# Altium PCB wisp-6-dipole.PcbDoc
Units mil, origin at the board's own origin, x right, y up, seen from the top; angles counter-clockwise.
Board outline 1302.99 x 5829.89 mil, 4 copper layers (Top Layer, Mid-Layer 1, Mid-Layer 2, Bottom Layer); 77 components, 65 nets, 270 pads, 87 vias.
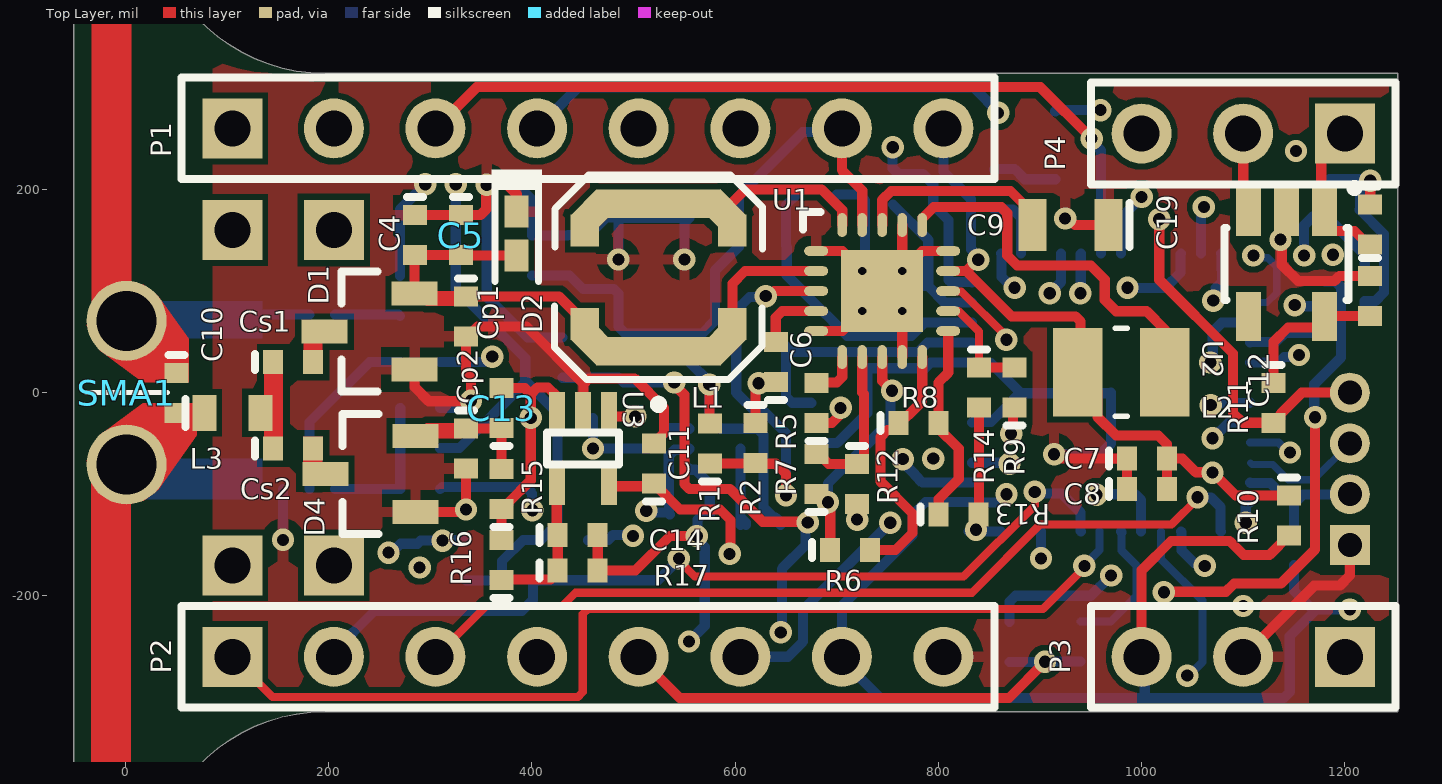
[diagram p0: Top Layer view]
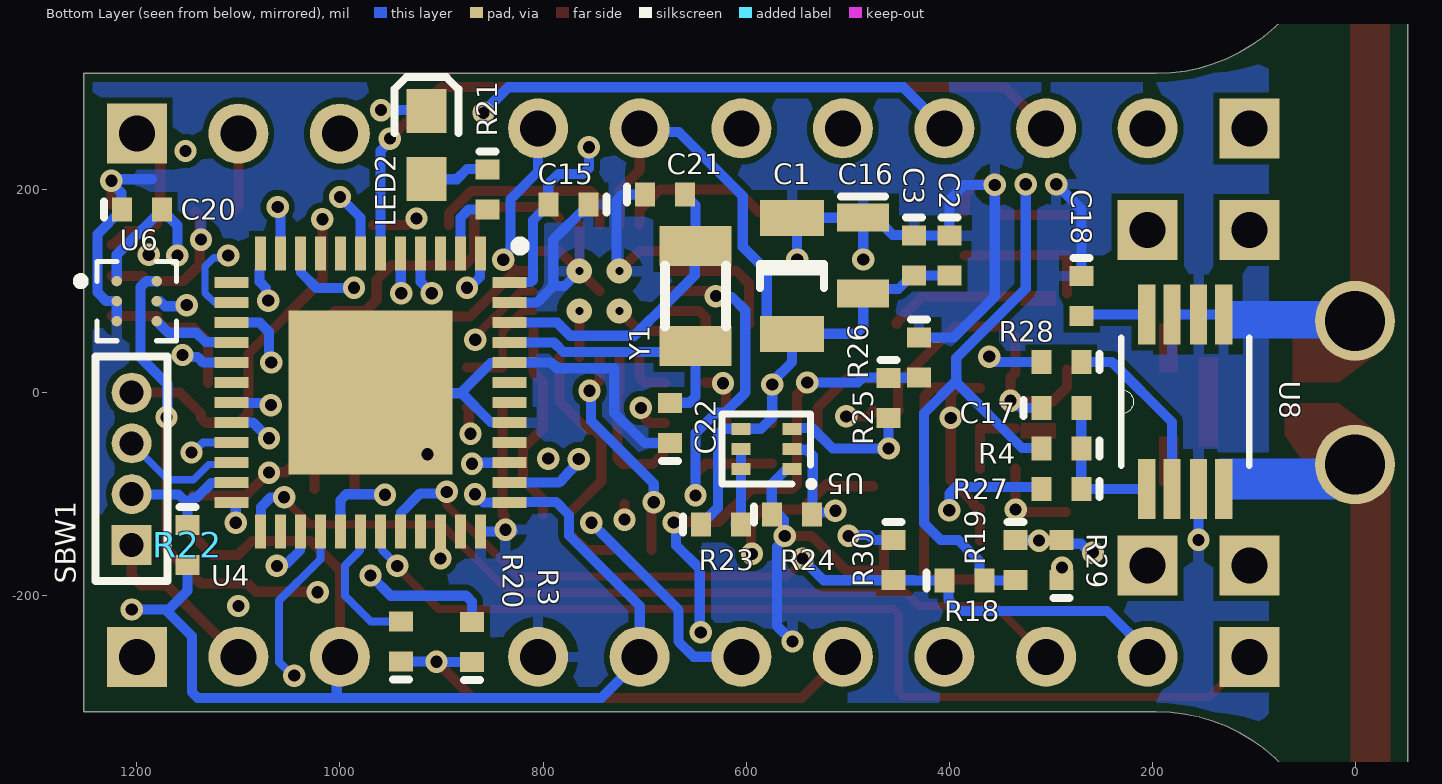
[diagram p1: Bottom Layer view, seen from below]
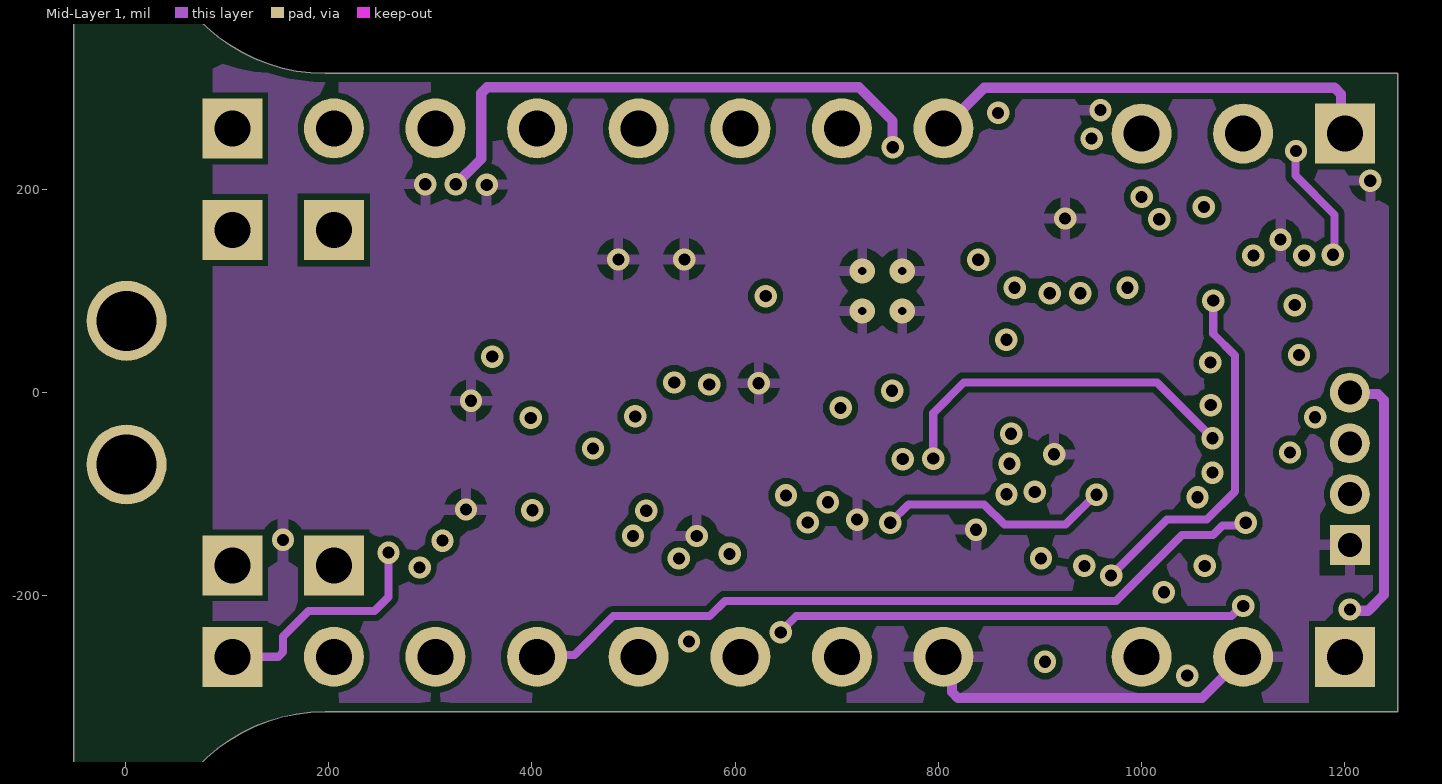
[diagram p2: Mid-Layer 1]
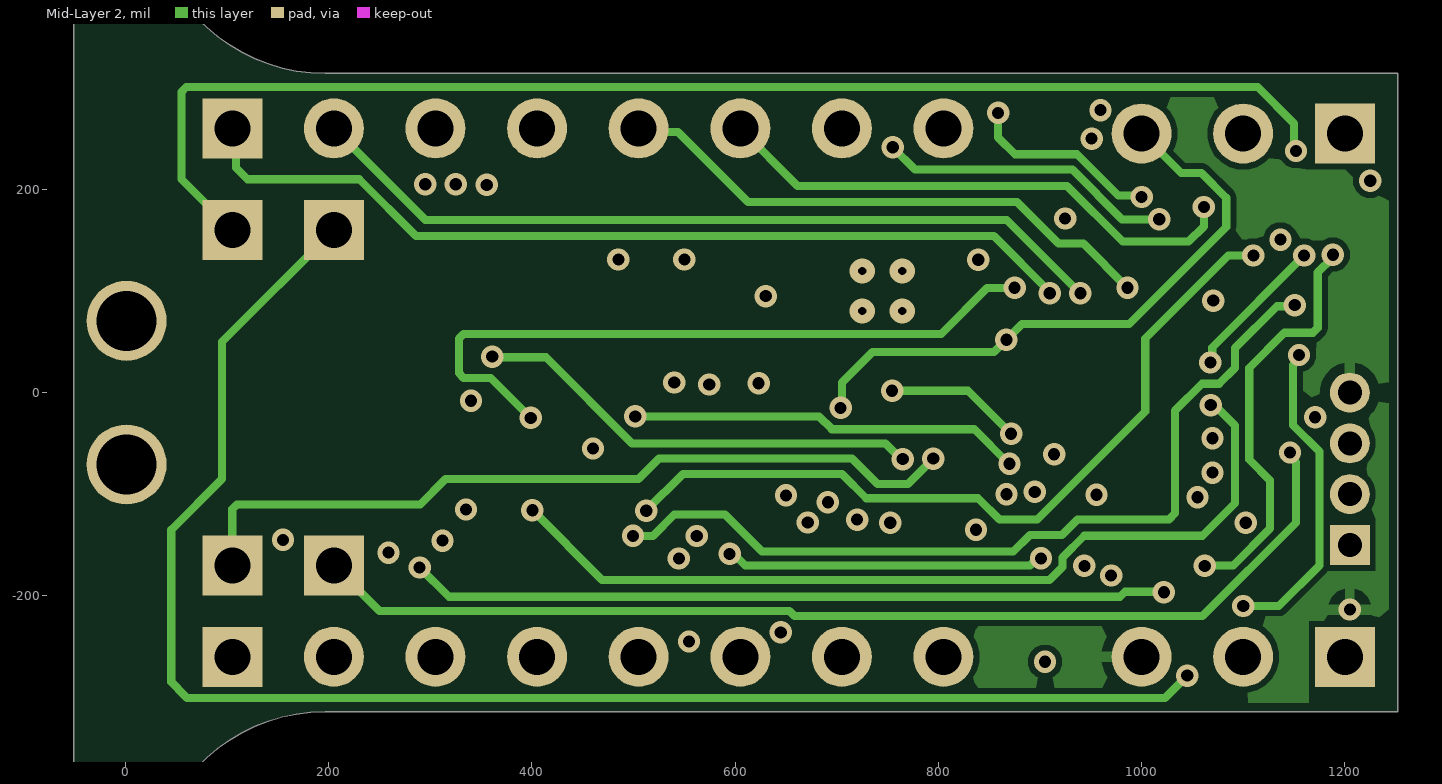
[diagram p3: Mid-Layer 2]

## Layer stack, top to bottom
Top Solder: solder mask 0.4, Solder Resist, Dk 3.5
Top Layer: signal copper 1.4
Dielectric 1: dielectric 12.6, FR-4, Dk 4.8
Mid-Layer 1: signal copper 1.4
Dielectric3: dielectric 12.6, FR-4, Dk 4.8
Mid-Layer 2: signal copper 1.4
Dielectric2: dielectric 12.6, FR-4, Dk 4.8
Bottom Layer: signal copper 1.4
Bottom Solder: solder mask 0.4, Solder Resist, Dk 3.5

## Board outline
-50.99,-2875.73 -50.99,2874.27 cw(c-13.49,2876.77) 24.01,2874.27 24.01,2874.28 24.01,486.61 ccw(c196.48,486.61) 196.48,314.15 1252,314.15 1252,-314.15 196.48,-314.15 196.48,-314.01 ccw(c196.48,-486.47) 24.01,-486.47 24.01,-2875.73 cw(c-13.49,-2878.23)

## Design rules (kind name [scope] priority, off if disabled: settings)
BoardOutlineClearance BoardOutlineClearance_1 [(OnLayer('Bottom Overlay') AND OnLayer('Top Overlay'))] p1: gap=8.5 ignorepadtopadclearanceinfootprint=FALSE except(5: Track-OutlineEdge Track-CavityEdge Track-CutoutEdge Track-SplitBarrior Track-SplitContinuation Text-OutlineEdge Text-CavityEdge Text-CutoutEdge Text-SplitBarrior Text-SplitContinuation)
BoardOutlineClearance [Not OnLayer('Bottom Overlay') AND  Not OnLayer('Top Overlay')] p2: gap=8.5 ignorepadtopadclearanceinfootprint=FALSE except(5: Text-OutlineEdge Text-CavityEdge Text-CutoutEdge Text-SplitBarrior Text-SplitContinuation)
Clearance [All] p1: gap=5.98 ignorepadtopadclearanceinfootprint=FALSE except(0: Arc-Hole Track-Hole SMDPad-Hole THPad-Hole Via-Hole Fill-Hole Poly-Hole Region-Hole Text-Hole; 6: SMDPad-SMDPad)
HoleSize [All] p1: absolutevalues=TRUE maxlimit=248.03 minlimit=7.87 maxpercent=80.000 minpercent=20.000
MinimumSolderMaskSliver [All] p1: minsoldermaskwidth=0.59
PolygonConnect [All] p1: connectstyle=Relief reliefconductorwidth=10 reliefentries=4 polygonreliefangle="90 Angle" airgapwidth=10
RoutingVias [All] p1: holewidth=8 width=20 viastyle="Through Hole" minholewidth=8 minwidth=20 maxholewidth=28 maxwidth=50
SilkToSilkClearance [All] p1: silktosilkclearance=0
SilkToSolderMaskClearance [IsPad] p1: minsilkscreentomaskgap=0 clearancetoexposedcopper=TRUE
SolderMaskExpansion [All] p1: expansion=4 istentingtop=FALSE
Width [All] p1: maxlimit=20 minlimit=7 preferedwidth=10
26 further rules are at their usual default settings.

## Classes and differential pairs
component class wisp-6-main: P1 P2 P3 P4 R3 R20
component class U_wisp-6-peripherals: C20 R23 R24 R25 R26 R29 R30 U5 U6
component class U_wisp-6-mcu: C15 C21 C22 LED2 R18 R19 R21 R22 SBW1 U4 Y1
component class U_wisp-6-afe: C1 C2 C3 C4 C5 C6 C7 C8 C9 C10 C11 C12 C13 C14 C16 C17 C18 C19 Cp1 Cp2 Cs1 Cs2 D1 D2 D4 L1 L2 L3 R1 R2 R4 R5 R6 R7 R8 R9 R10 R11 R12 R13 R14 R15 R16 R17 R27 R28 SMA1 U1 U2 U3 U8

## Components (designator, comment, footprint, x,y, rotation, side; value= is the part's Value field where it differs from the comment)
C1 "Cap" 1206 555,115 r270 bottom value=220uF
C2 "Cap" 0402 400,135 r270 bottom value=4.7uF
C3 "Cap" 0402 435,135 r270 bottom value=0.1uF
C4 "Cap" 0402 285,155 r270 top value=0.1uF
C5 "Cap" 0402 330,155 r270 top value=4.7uF
C6 "Cap" 0402 640,30 r90 top value=0.01uF
C7 "Cout1" 0402 1005.31,-65 r0 top value=22uF
C8 "Cout2" 0402 1005.31,-95 r0 top value=DNP
C9 "Cap" 0805 930,165 r180 top value=100uF
C10 "Cap" 0402 50,-0.31 r270 top value=5.6pF
C11 "Cap" 0402 520,-69.69 r90 top value=0.1uF
C12 "Cap" 0402 1225,95 r270 top value=1uF
C13 "Cap" 0402 370,-15.32 r90 top value=33pF
C14 "Cap" 0402 445,-140 r0 top value=1nF
C15 "Cap" 0402 775,185 r0 bottom value=4.7uF
C16 "Cap" 0805 485,135 r270 bottom value=100uF
C17 "Cap" 0402 290,-15 r180 bottom value=0.1uF
C18 "Cap" 0402 270,95 r270 bottom value=3.3nF
C19 "Cap" 0402 1225,165.31 r270 top value=1uF
C20 "Cap" 0402 1195,180 r180 bottom value=0.1uF
C21 "Cap" 0402 680,195 r180 bottom value=10pF
C22 "Cap" 0402 675,-30 r90 bottom value=10pF
Cp1 "Cap" 0402 335,75 r270 top value=33pF
Cp2 "Cap" 0402 335,-55 r270 top value=10pF
Cs1 "Cap" 0402 165,30 r0 top value=33pF
Cs2 "Cap" 0402 165,-55 r0 top value=1pF
D1 "SMS7630-005LF" "SOT23 - N" 240,60 r180 top
D2 "Zener_SOD-523" Zener_SOD-523 385,156.65 r180 top
D4 "SMS7630-005LF" "SOT23 - N" 240.95,-80 r180 top
L1 "Ind_LPS4018" LPS4018 520,105 r180 top value=22uH
L2 "Ind" IND1008 980,20 r180 top value=10nH
L3 "Ind" 0603 105,-20 r0 top value=16nH
LED2 "LED" "Diode - 0603" 915,243.46 r270 bottom
P1 "Header 8" HDR1X8 105,260 r0 top
P2 "Header 8" HDR1X8 105,-260 r0 top
P3 "Header 3" HDR1X3 1200,-260 r180 top
P4 "Header 3" HDR1X3 1200,255 r180 top
R1 "R_80%" 0402 575,-50 r90 top value=DNP
R2 "R_50%" 0402 620,-49.68 r270 top value=0
R3 "Res" 0402 870,-245.32 r90 bottom value=0
R4 "Rok3" 0402 290,-55 r0 bottom value=DNP
R5 "R_VBAT_OK" 0402 680,-10.32 r90 top value=0
R6 "Rok3" 0402 713.21,-155 r0 top value=2.94M
R7 "Rov2" 0402 680,-80 r90 top value=6.8M
R8 "Rok2" 0402 780.31,-30 r0 top value=5.49M
R9 "Rout2" 0402 875,5 r90 top value=6.81M
R10 "Res" 0402 1145,-121.03 r270 top value=DNP
R11 "Res" 0402 1130,-10 r270 top value=0
R12 "Rov1" 0402 720,-90 r270 top value=5.49M
R13 "Rok1" 0402 820,-120 r0 top value=4.53M
R14 "Rout1" 0402 840,5 r270 top value=6.04M
R15 "Res" 0402 370,-94.69 r90 top value=560k
R16 "Res" 0402 370,-165 r90 top value=22k
R17 "Res" 0402 445,-175 r0 top value=220k
R18 "Res" 0402 385.32,-185 r180 bottom value=47k
R19 "Res" 0402 335,-165 r270 bottom value=47k
R20 "Res" 0402 940,-245 r90 bottom value=DNP
R21 "Res" 0402 855,200 r270 bottom value=33
R22 "Res" 0402 1150,-150 r270 bottom value=47k
R23 "Res" 0402 625,-130 r180 bottom value=1M
R24 "Res" 0402 555.32,-120 r180 bottom value=1M
R25 "Res" 0402 460,-5.31 r270 bottom value=1M
R26 "Res" 0402 430,34.69 r270 bottom value=1M
R27 "Rok3" 0402 289.69,-95 r0 bottom value=0
R28 "Rok3" 0402 290,30 r0 bottom value=0
R29 "Res" 0402 290,-165 r90 bottom value=0
R30 "Res" 0402 455,-165 r270 bottom value=0
SBW1 "MHDR1X4" MHDR1X4 1205,-150 r90 bottom
SMA1 "SMA - Hole - 2 Pin" "SMA - Hole - 2 Pin" 1,0 r180 top
U1 "BQ25570" BQ25570 744.68,99.96 r0 top
U2 "TPS7A0220PDBVR" SOT23-5 1142.6,126.57 r180 top
U3 "TLV7041" SC70-5 450,-55 r180 top
U4 "MSP430 Wolverine 48-Pin" MSP_QFN48_RGZ_PAD0 970,0 r270 bottom
U5 "SI1016X" "SC-89-6 Vishay" 580.12,-55.32 r0 bottom
U6 "HDC2010YPAR" BGA6C100X50P2X3_HDC2010YPAR 1200,90 r180 bottom
U8 "ADG902BRMZ" SOP65P490X110-8N 168,-9 r90 bottom
Y1 "XTAL" "XTAL [3.20mm x 1.50mm]" 650,95 r90 bottom value=32.768kHz

## Footprints (in the part's own frame and the unit in brackets; to place one, negate y for a bottom-side part, rotate by r counter-clockwise, add the part's x,y. Pads: shape width x height; smd on the part's side, far side on the other; paste and mask are expansions set on the pad)
0402 [mm] "Surface Mount; Body 1 x 0.5 mm (LxW typ)"
  rect 0.5x0.6 smd: 1(-0.5,0) 2(0.5,0)
  silkscreen extent -0.95,-0.2 -0.95,0.2, body extent -0.5,-0.25 0.5,0.25, height 0.5
0603 [mm] "Surface Mount; Body 1.6 x 0.8 mm (LxW typ)"
  rect 0.6x0.9 smd: 1(-0.7,0) 2(0.7,0)
  silkscreen extent -1.17,-0.35 -1.17,0.35, body extent -0.8,-0.4 0.8,0.4, height 0.8
0805 [mm] "Surface Mount; Body 2.0 x 1.25 mm (LxW typ)"
  rect 0.7x1.3 smd: 1(-0.95,0) 2(0.95,0)
  silkscreen extent -1.48,-0.55 -1.48,0.55, body extent -1,-0.63 1,0.63, height 1.25
1206 [mm] "Surface Mount; Body 3.2 x 1.6 mm (LxW typ)"
  rect 0.9x1.6 smd: 1(-1.45,0) 2(1.45,0)
  silkscreen extent -0.3,-0.8 0.3,0.8, body extent -1.6,-0.8 1.6,0.8, height 1.1
BGA6C100X50P2X3_HDC2010YPAR [mm]
  round 0.26 smd: A1(-0.5,0.5) A2(0.5,0.5) B1(-0.5,0) B2(0.5,0) C1(-0.5,-0.5) C2(0.5,-0.5)
  silkscreen extent -1.5,-0.99 0.99,0.99
BQ25570 [mm] "Boost Charger"
  oval 0.6x0.24 smd paste-0.025 mask+0.07: 1(-1.65,1) 2(-1.65,0.5) 3(-1.65,0) 4(-1.65,-0.5) 5(-1.65,-1) 11(1.65,-1) 12(1.65,-0.5) 13(1.65,0) 14(1.65,0.5) 15(1.65,1)
  oval 0.24x0.6 smd paste-0.025 mask+0.07: 6(-1,-1.65) 7(-0.5,-1.65) 8(0,-1.65) 9(0.5,-1.65) 10(1,-1.65) 16(1,1.65) 17(0.5,1.65) 18(0,1.65) 19(-0.5,1.65) 20(-1,1.65)
  rect 2.05x2.05 smd paste-1.025 mask+0.07: 21(0,0)
  silkscreen extent -1.97,1.54 -1.54,1.98, body extent -1.82,-1.82 1.83,1.83, height 1.01
"Diode - 0603" [mm] "Diode: Body 1.6 x 0.8 mm (LxW typ)"
  rect 1.1x1 smd: 1(0.85,0) 2(-0.85,0)
  silkscreen extent -1.7,-0.8 -0.3,0.8
HDR1X3 [mm] "Connector; Header; 3 Position"
  rect 1.5x1.5 hole 0.9: 1(0,0)
  round 1.5 hole 0.9: 2(2.54,0) 3(5.08,0)
  silkscreen extent -1.27,-1.27 6.35,1.27
HDR1X8 [mm] "Connector; Header; 8 Position"
  rect 1.5x1.5 hole 0.9: 1(0,0)
  round 1.5 hole 0.9: 2(2.54,0) 3(5.08,0) 4(7.62,0) 5(10.16,0) 6(12.7,0) 7(15.24,0) 8(17.78,0)
  silkscreen extent -1.27,-1.27 19.05,1.27
IND1008 [mm]
  rect 1.24x2.22 smd: 1(-1.09,0) 2(1.09,0)
  silkscreen extent -0.15,-1.1 0.15,1.1
LPS4018 [mil] "Inductor"
  rect 28x31.5 smd: 1(-77.03,37.61) 1(67.97,37.61) 2(-77.03,-54.39) 2(67.97,-54.39)
  rect 35.5x28 smd rot 45: 1(-68.53,55.61) 2(59.47,-72.39)
  rect 123x28 smd: 1(-4.53,64.11) 2(-4.53,-80.89)
  rect 35.5x28 smd rot 135: 1(59.47,55.61) 2(-68.03,-72.89)
  silkscreen extent -107,-109 98,120, body extent -85,-89 76,72, height 71
MHDR1X4 [mm] "Connector; Header; 4 Position"
  rect 1x1 hole 0.6: 1(0,0)
  round 1 hole 0.6: 2(1.27,0) 3(2.54,0) 4(3.81,0)
  silkscreen extent -0.9,-0.9 4.71,0.9
MSP_QFN48_RGZ_PAD0 [mm]
  rect 4.1x4.1 smd: 0(0,0)
  rect 0.85x0.28 smd: 1(-3.475,2.75) 2(-3.475,2.25) 3(-3.475,1.75) 4(-3.475,1.25) 5(-3.475,0.75) 6(-3.475,0.25) 7(-3.475,-0.25) 8(-3.475,-0.75) 9(-3.475,-1.25) 10(-3.475,-1.75) 11(-3.475,-2.25) 12(-3.475,-2.75) 25(3.475,-2.75) 26(3.475,-2.25) 27(3.475,-1.75) 28(3.475,-1.25) 29(3.475,-0.75) 30(3.475,-0.25) 31(3.475,0.25) 32(3.475,0.75) 33(3.475,1.25) 34(3.475,1.75) 35(3.475,2.25) 36(3.475,2.75)
  rect 0.28x0.85 smd: 13(-2.75,-3.475) 14(-2.25,-3.475) 15(-1.75,-3.475) 16(-1.25,-3.475) 17(-0.75,-3.475) 18(-0.25,-3.475) 19(0.25,-3.475) 20(0.75,-3.475) 21(1.25,-3.475) 22(1.75,-3.475) 23(2.25,-3.475) 24(2.75,-3.475) 37(2.75,3.475) 38(2.25,3.475) 39(1.75,3.475) 40(1.25,3.475) 41(0.75,3.475) 42(0.25,3.475) 43(-0.25,3.475) 44(-0.75,3.475) 45(-1.25,3.475) 46(-1.75,3.475) 47(-2.25,3.475) 48(-2.75,3.475)
  silkscreen extent -3.78,3.63 -3.55,3.85, body extent -3.3,-3.3 3.3,3.3, height 1
SC70-5 [mm] "SC70-5"
  rect 0.4x0.92 smd: 1(-0.65,-0.95) 2(0,-0.95) 3(0.65,-0.95) 4(0.65,0.95) 5(-0.65,0.95)
  silkscreen extent -0.9,-0.4 0.9,0.4
"SC-89-6 Vishay" [mm]
  rect 0.478x0.3 smd: 1(-0.638,0.5) 2(-0.638,0) 3(-0.638,-0.5) 4(0.638,-0.5) 5(0.638,0) 6(0.638,0.5)
  silkscreen extent -1.15,-0.87 1.11,0.91
"SMA - Hole - 2 Pin" [mm] "SMA port for wisp"
  round 2 hole 1.5: 1(0,1.796) 2(0,-1.796)
  silkscreen extent -1.02,0 1.02,0
SOP65P490X110-8N [mil]
  rect 59x17 smd: 1(-86,38) 2(-86,13) 3(-86,-13) 4(-86,-38) 5(86,-38) 6(86,-13) 7(86,13) 8(86,38)
  silkscreen extent -63,-63 63,63, body extent -96,-59 96,59, height 43
"SOT23 - N" [mm] "SOT23, 3-Leads, Body 2.9x1.3mm, Pitch 0.95mm, Lead Span 2.3mm - Reverse Pinning, IPC Medium Density"
  rect 1.15x0.6 smd: 1(-1.125,0.95) 2(-1.125,-0.95) 3(1.125,0)
  silkscreen extent -0.2,-1.5 0.7,1.5, body extent -0.7,-1.5 0.7,1.5, height 1.1
SOT23-5 [mm] "SOT23-5"
  rect 0.62x1.22 smd: 1(-0.95,-1.31) 2(0,-1.31) 3(0.95,-1.31) 4(0.95,1.31) 5(-0.95,1.31)
  silkscreen extent -1.8,-2 1.55,0.9, body extent -1.55,-0.9 1.55,0.9, height 1
"XTAL [3.20mm x 1.50mm]" [mm] "FC-135   crystal - epson eletronics"
  rect 1x1.8 smd: 1(-1.25,0) 2(1.25,0)
  silkscreen extent -0.76,-0.76 0.76,0.76
Zener_SOD-523 [mm] "Zener Diod"
  rect 0.6x0.8 smd paste-0.05: 1(0,-0.55) 2(0,0.55)
  silkscreen extent -0.63,-1.6 0.64,1.2, body extent -0.4,-0.8 0.4,0.8, height 0.72

## Part data
C1 C2 C3 C4 C5 C6 C9 C10 C11 C12 C13 C14 C15 C16 C17 C18 C19 C20 C21 C22 Cp1 Cp2 Cs1 Cs2: "Ceramic Capacitor (Surface Mount)", Manufacturer="Generic Ceramic Chip Cap (TBD)"
C7 C8: library part Cap, "Ceramic Capacitor (Surface Mount)", Manufacturer="Generic Ceramic Chip Cap (TBD)", Comment_1=Cap
D1 D4: "Schottky Diodes & Rectifiers Ls=1.5nH SOT-23 Series Pair"
D2: "Diode - Zener"
L1: "Inductor (Surface Mount)", Manufacturer="Coil Craft"
L2 L3: "Inductor (Surface Mount)"
LED2: library part "Diode - LED", "Typical RED, GREEN, YELLOW, AMBER GaAs LED"
P1 P2: "Header, 8-Pin", LatestRevisionDate=17-Jul-2002, LatestRevisionNote="Re-released for DXP Platform.", Publisher="Altium Limited"
P3 P4: "Header, 3-Pin", LatestRevisionDate=17-Jul-2002, LatestRevisionNote="Re-released for DXP Platform.", Publisher="Altium Limited"
R1 R2 R4 R5 R6 R7 R8 R9 R12 R13 R14 R27 R28: library part Res, "Chip Resistor (Surface Mount)", Manufacturer="Generic Chip Res (TBD)", Comment_1=Res
R3 R10 R11 R15 R16 R17 R18 R19 R20 R21 R22 R23 R24 R25 R26 R29 R30: "Chip Resistor (Surface Mount)", Manufacturer="Generic Chip Res (TBD)"
SBW1: "Header, 4-Pin", LatestRevisionDate=17-Jul-2002, LatestRevisionNote="Re-released for DXP Platform.", Publisher="Altium Limited"
SMA1: "Two pin SMA connector wisp", Note="This part is used to attach the antennae to WISP in the layout"
U1: "Boost Charger", Digi-Key Part Number=296-37014-1-ND, Manufacturer="Texas Instruments", Manufacturer Part Number=bq25570
U2: library part TPS7A0218PDBVR, "IC REG LINEAR 1.8V 200MA SOT23-5"
U3: library part NCS2200, "Comparator General Purpose Open Drain SC-70-5", Digi-Key Part Number=NCS2200SQ2T2GOSTR-ND, Manufacturer="ON Semiconductor", Manufacturer Part Number=NCS2200SQ2T2G
U4: library part MSP430FR596X_586X_RGZ, "16-bit FRAM MCU", Manufacture="Texas Instrument", PartNumber=MSP430FR5969, Datasheet Link=http://www.ti.com/lit/gpn/msp430fr5969
U5: "NMOS and PMOS array"
U6: "Humidity Temperature Sensor 0 ~ 100% RH IÂ²C Â±2% 8s Surface Mount", Package="DSBGA-6 Texas Instruments", Digi-Key_Part_Number=296-47774-1-ND, Digi-Key_Purchase_URL=https://www.digikey.in/product-detail/en/texas-instruments/HDC2010YPAR/296-47774-1-ND/8133123?utm_source=snapeda&utm_medium=aggregator&utm_campaign=symbol, MF="Texas Instruments", MP=HDC2010YPAR, SnapEDA_Link=https://www.snapeda.com/parts/HDC2010YPAR/Texas%20Instruments/view-part/1603012/?ref=snap
U8: "RF Switch IC General Purpose SPST 2.5GHz 50Ohm 8-MSOP", Package="MSOP-8 Analog Devices", Check_prices=https://www.snapeda.com/parts/ADG902BRMZ/Analog%20Devices%20Inc./view-part/233734/?ref=eda, Digi-Key_Part_Number=ADG902BRMZ-ND, MF="Analog Devices", MP=ADG902BRMZ, Purchase-URL=https://pricing.snapeda.com/search/part/ADG902BRMZ/?ref=eda, SnapEDA_Link=https://www.snapeda.com/parts/ADG902BRMZ/Analog%20Devices%20Inc./view-part/233734/?ref=snap
Y1: library part "XTAL 2-pins", "Crystal Oscillator - [3.20mm x 1.50mm]", Digi-Key Part Number="example: SE2413CT-ND", Manufacturer="Epson Toyocom Corporation", Manufacturer Part Number="FC-135 32.7680KA-A3"

## Free pads (board coordinates)
  rect 59.06x59.06 hole 35.43: 1(105,-170) 1(105,160) 1(205,-170) 1(205,160)

## Via types
v1: diameter 22, hole 12, Top Layer to Bottom Layer, tented both sides, 83 vias
v2: diameter 25, hole 8, Top Layer to Bottom Layer, 4 vias

## Nets (pads, with @x,y where several pads share a name; then routed paths per layer and width w, separated by ;. In a path a pad name is that pad's centre, name@x,y a point inside that pad or via, vN(x,y) a via of type N, cw(c..) or ccw(c..) an arc to the next point about the centre after c; other vN are vias at no path point)
1V8: C12.2 R11.1 U2.5 | length 147.9
  Top Layer w10: R11.1 1130,50 1144.14,64.14 1172.8,64.14 1180,71.35 U2.5 1180.31,75.31 C12.2
3V3: C7.2 C8.2 C19.2 L2.2 P1.8 P4.1 R10.1 U1.14 U2.1 | length 1298.1
  Top Layer w10: P1.8 P1.8@806.34,260 ; U1.14 827.38,119.65 ; v1(839.24,130.76) 838.5,130.76 827.38,119.65 ; C8.2 C7.2 ; v1(1069.84,-78.78) 1069.48,-78.43 1053.43,-78.43 1040,-65 C7.2 ; v1@1070,-78.67 1092.68,-101.35 R10.1 ; P4.1 1176.85,231.85 1176.85,181.3 U2.1 1180,166.34 1187.2,159.13 1209.53,159.13 1223.03,145.63 C19.2 ; 827.38,119.65 872.02,75 935,75 940,70 940,17.09 L2.2 956.5,0.59 956.5,-23.7 975,-42.2 1016.35,-42.2 1025,-50.86 C7.2
  Mid-Layer 1 w10: P1.8 845,300 1190,300 1196.33,293.67 1196.33,258.67 P4.1 P4.1@1204.91,250.09
  Mid-Layer 2 w8: P1.8 P1.8@812.57,260
  Bottom Layer w10: P1.8 805,217.61 832.2,190.4 832.2,141.04 839.24,134.01 v1(839.24,130.76)
ANT: C10.2 L3.1 SMA1.1 U8.4
BITLINE: C13.2 R15.1 R16.2 U3.3 U4.1 | length 965.2
  Top Layer w10: R16.2 R15.1@370,-115 ; R15.1 R15.1@370,-115 ; C13.2 392.94,4.37 398.79,-1.49 ; U3.3 424.41,-3.73 415.68,5 405.28,5 398.79,-1.49 ; R15.1@370,-115 371.34,-115 376.81,-109.53 376.81,-108.19 398.79,-86.21 v1(398.79,-24.88) 398.79,-1.49
  Mid-Layer 2 w8: v1(398.79,-24.88) 359.45,14.46 332.71,14.46 328.02,19.14 328.02,53.11 332.71,57.79 802.79,57.79 847.91,102.91 874.79,102.91 v1(875,103.12)
  Bottom Layer w10: U4.1 862.24,136.3 862.24,113.82 872.95,103.12 v1(875,103.12)
BITLINE_LPF: C14.1 R16.1 R17.1 U3.4 | length 143.5
  Top Layer w10: R16.1 370.64,-184.05 418.24,-184.05 425.32,-176.97 C14.1 424.41,-139.09 U3.4
GND: C1.1 C2.1 C3.1 C4.1 C5.1 C6.1 C7.1 C8.1 C9.1 C10.1 C11.2 C12.1 C14.2 C15.1 C16.1 C17.1 C18.1 C19.1 C20.1 C21.1 C22.1 Cp1.2 Cp2.2 D1.1 D2.1 D4.1 LED2.2 P2.8 P3.2 R2.1 R12.2 R13.2 R14.2 R17.2 R24.1 R26.1 SBW1.1 SMA1.2 U1.1 U1.5 U1.9 U1.15 U1.17 U1.21 U2.2 U3.2 U4.0 U4.36 U4.41 U4.44 U4.47 U5.1 U6.B1 U6.C1 U8.3 U8.5 U8.6 U8.7 | length 4212.1
  Top Layer w10: D1.1 284.29,5.71 298.49,-8.49 340,-8.49 v1(340,-8.02) 340,15 335,20 Cp1.2 336.97,55.31 346.65,65 394.6,65 450.79,8.81 ; C4.1 C5.1 349.14,174.69 355,180.54 355,203.91 v1(355.55,204.45) 356.09,205 375,205 385,195 D2.1 ; D4.1 329.35,-117.4 331.75,-115 v1(335,-115) Cp2.2 ; U3.2 450.79,-16.81 450.79,8.81 ; C14.2 R17.2 501.86,-175 535.77,-141.09 v1(562.18,-141.09) ; C11.2 530,-40 530,-15 500.99,14.01 455.99,14.01 450.79,8.81 ; R2.1 620,2.81 623.06,5.87 v1(623.06,9.12) 623.66,9.72 639.4,9.72 C6.1 ; U1.5 705.32,60.59 v2(725,80.28) ; U1.1 705.32,139.33 v2(725,119.65) ; v1(720,-125) R12.2 ; U1.21 v2(764.37,119.65) ; U1.9 v2(764.37,80.28) ; U1.17 v2(764.37,119.65) ; U1.15 784.06,139.33 v2(764.37,119.65) ; v1(837.03,-135) 838.36,-133.67 838.36,-121.33 R13.2 ; R13.2@840,-120 R14.2 ; v1(913.94,-60.72) 917.19,-60.72 921.47,-65 C7.1 C8.1 ; v1(924.74,171.35) 927.99,171.35 934.34,165 C9.1 ; P3.2 1170,-190 1195,-190 1205,-180 SBW1.1 ; v1(1136.75,150.58) 1138.02,149.31 1138.02,125.89 1153.91,110 1190,110 1194.68,114.68 C12.1 ; v1@1138.02,150.58 1138.02,173.57 U2.2 ; C19.1 v1(1225,208.49)
  Top Layer w20: SMA1.2@-3.29,75 SMA1.2
  Mid-Layer 1 w10: P2.8 813.32,-268.32 813.32,-294.66 819.17,-300.51 1059.49,-300.51 P3.2
  Bottom Layer w10: U8.5 U8.6 U8.7 ; v1(155,-145) U8.3 ; C18.1 270,180 v1(295,205) ; C17.1 329.77,-15 336.75,-8.02 v1(340,-8.02) ; R26.1 395.63,54.37 355.55,94.45 v1(355.55,204.45) 385.55,204.45 400,190 C2.1 C3.1 435.48,155.17 455.95,155.17 464.41,163.62 473.19,172.4 C16.1 ; v1(485,131.05) C16.1 ; v1(550,131.05) 550,167.09 C1.1 485.31,172.09 C16.1 ; v1(554.6,-245.03) 570,-229.63 570,-152.16 562.18,-144.34 v1(562.18,-141.09) 562.95,-140.32 562.95,-125.09 568.04,-120 R24.1 575,-90 560.91,-75.91 555.91,-75.91 U5.1 ; C22.1 700.32,-49.68 730,-20 730,24.02 786.62,24.02 792.13,29.53 U4.44 833.7,29.02 851.79,29.02 880.15,0.66 880.15,-0.66 ; C21.1 722.01,195 727.87,189.14 727.87,122.52 v2(725,119.65) ; C15.1 790,150.31 790,105 ; v2(764.37,119.65) 779.02,105 790,105 ; v1@829.62,-136.81 U4.36 ; U4.41 833.7,-29.02 851.79,-29.02 880.15,-0.66 ; U4.47 806.42,88.58 790,105 ; v1(913.94,-60.72) 959.28,-60.72 970,-50 U4.0 969.34,-0.66 880.15,-0.66 ; LED2.2 916.09,278.02 v1(959.58,278.02) ; 1185,210 1223.49,210 v1(1225,208.49) 1225,206.63 1215,196.63 C20.1@1215,180.31 ; C20.1 C20.1@1215,180.31 ; U6.C1 U6.B1 1230,90 1238.5,98.5 1238.5,156.18 1215,179.69 C20.1@1215,180.31
I2C_SCL: P2.2 R18.1 R30.2 U4.32 | length 868.6
  Top Layer w8: v1(544.6,-163.35) 544.6,-165.4 560.25,-181.05 824.89,-181.05 894.92,-111.02 v1(894.92,-97.69)
  Top Layer w10: v1@892.62,-99.99 v1(894.92,-97.69)
  Bottom Layer w10: P2.2 205,-255 245,-215 390,-215 401.07,-203.93 401.07,-188.93 R18.1 405.16,-184.84 434.84,-184.84 435,-184.69 R30.2 524.11,-184.69 544.6,-164.2 v1(544.6,-163.35) ; v1(894.92,-97.69) 896.38,-99.16 920.92,-99.16 939.96,-118.21 939.96,-136.3 U4.32
I2C_SDA: P2.1 R19.1 R29.2 U4.31 | length 1314
  Top Layer w8: P2.1 144.51,-299.51 445.31,-299.51 450,-294.83 450,-217.97 454.95,-213.02 902.87,-213.02 943.67,-172.22 v1(943.67,-170.53)
  Mid-Layer 1 w8: P2.1 150.31,-260 155,-255.31 155,-240 180,-215 245,-215 258.8,-201.2 v1(258.8,-157.5)
  Mid-Layer 1 w10: v1(311.98,-145.72) v1@312.14,-145.88
  Mid-Layer 2 w8: P2.1 110,-260 P2.1@113.67,-256.33
  Bottom Layer w8: v1(943.67,-170.53) 943.67,-169.98 958.65,-155 U4.31@958.65,-136.35
  Bottom Layer w10: v1(258.8,-157.5) 261.98,-157.5 270.65,-148.83 287.04,-148.83 290.36,-145.52 311.78,-145.52 v1(311.98,-145.72) ; v1@315.31,-145.32 R19.1
LDO_EN: P4.2 U2.3 | length 79
  Top Layer w10: P4.2 1100,183.35 U2.3
LED2: R21.2 U4.2 | length 65.1
  Bottom Layer w10: R21.2 873.25,180.31 881.42,172.15 U4.2
NetC6_2: C6.2 U1.4 | length 66.6
  Top Layer w10: C6.2 640,73.91 646.37,80.28 U1.4
NetC9_2: C9.2 U1.18 | length 197.1
  Top Layer w10: U1.18 744.69,189.69 753.5,198.5 870.91,198.5 892.6,176.81 C9.2
NetC11_1: C11.1 U3.5 U4.34 | length 510.5
  Top Layer w10: U3.5@475.3,-92.11 517.26,-92.11 C11.1 545.63,-115 585,-115 595.31,-125.31 595.31,-157.95 v1(594.49,-158.77)
  Mid-Layer 2 w8: v1(594.49,-158.77) 598.28,-158.77 609.87,-170.35 890.05,-170.35 897.24,-163.16 v1(901.03,-163.16)
  Bottom Layer w10: U4.34 U4.34 v1@901.07,-163.13 ; v1(901.03,-163.16) v1@901.07,-163.13
NetC13_1: C13.1 Cp2.1 D4.2 R15.2 | length 75.1
  Top Layer w10: Cp2.1 369.68,-35.32 C13.1 R15.2
NetC17_2: C17.2 R4.1 R27.1 U8.1 | length 144.1
  Bottom Layer w10: U8.1 R27.1 270.31,-94.69 C17.2
NetC18_2: C18.2 U8.8 | length 64.7
  Bottom Layer w10: U8.8 268.31,77 C18.2
NetC21_2: C21.2 U4.46 Y1.2 | length 296.3
  Bottom Layer w10: C21.2@660,194.69 650,184.69 Y1.2 650.8,143.41 650.8,115.39 689.73,76.46 689.98,76.46 696.42,70.02 696.42,69.77 710.2,55.98 773.29,55.98 786.2,68.9 U4.46
NetC22_2: C22.2 U4.45 Y1.1 | length 266.9
  Bottom Layer w10: C22.2 674.69,-10 655.86,-10 650,-4.14 Y1.1 655.79,40 780,40 789.21,49.21 U4.45
NetCs1_1: Cs1.1 Cs2.1 L3.2
NetCs1_2: Cs1.2 D1.3
NetCs2_2: Cs2.2 D4.3
NetL1_2: L1.2 U1.20 | length 149.6
  Top Layer w10: L1.2@588.03,177.89 610.14,200 685,200 705.32,179.69 U1.20
NetL2_1: L2.1 U1.16 | length 371.2
  Top Layer w10: U1.16@784.33,171.73 795.12,182.52 861.98,182.52 867.83,176.66 867.83,134.86 877.62,125.08 949.92,125.08 963.75,111.25 963.75,91.25 975,80 1005,80 1022.91,62.09 L2.1
NetLED2_1: LED2.1 R21.1 | length 64.3
  Bottom Layer w10: R21.1 855.32,220 875,220 885,210 LED2.1
NetP2_5: P2.5 R3.1 R20.1 | length 501.6
  Top Layer w10: P2.5 545.51,-300.51 869.49,-300.51 v1(905,-265)
  Bottom Layer w10: R3.1 v1(905,-265) 905.32,-264.68 R20.1
NetR1_1: R1.1 R2.2 U1.3 | length 397.4
  Top Layer w10: R1.1 619.69,-69.68 620,-70 640,-70 650,-80 v1(650,-101.2) ; v1(630,95) 633.25,95 638.21,99.96 U1.3
  Mid-Layer 2 w8: v1(630,95) v1@631.92,93.08
  Bottom Layer w10: v1(630,95) 629.12,94.12 614.12,94.12 601.08,81.08 601.08,0.01 620.74,-19.65 629.65,-19.65 650,-40 v1(650,-101.2)
NetR5_2: R5.2 U1.6 | length 47.5
  Top Layer w10: R5.2 680.63,10 700,10 705.32,15.32 U1.6
NetR6_1: R6.1 R7.1 R9.1 U1.8 | length 385.3
  Top Layer w10: R7.1@687.79,-104.53 v1(691.2,-107.94) ; R6.1 693.52,-130.03 ; 693.5,-130 v1@693.5,-109.5 ; U1.8 744.69,11.73 754.45,1.97 v1(754.45,1.8) ; v1(871.55,-40.46) 873.28,-38.74 873.28,-16.41 R9.1
  Mid-Layer 2 w8: v1(754.45,1.8) 829.29,1.8 v1(871.55,-40.46)
  Bottom Layer w10: v1(691.2,-107.94) 691.2,-89.54 752.98,-27.76 752.98,0.33 v1(754.45,1.8)
NetR6_2: R6.2 R8.1 U1.10 | length 255.4
  Top Layer w10: R6.2 757.74,-155 774.55,-138.18 774.55,-118.99 742.9,-87.34 742.9,-43.79 749.88,-36.81 755.79,-36.81 784.02,-8.58 784.02,8.15 784.06,8.19 U1.10
NetR7_2: R7.2 R12.1 U1.7 | length 152.2
  Top Layer w10: R7.2@681.97,-60.31 691.97,-70.32 R12.1 721.97,-70.32 726.81,-65.47 726.81,-1.65 725,0.16 U1.7
NetR8_2: R8.2 R13.1 U1.11 | length 201
  Top Layer w10: R13.1 800.32,-104.68 820,-85 820,-55 800,-35 R8.2 800,-3.19 800.04,-3.15 800.04,10.04 809.65,19.65 U1.11
NetR9_2: R9.2 R14.1 U1.12 | length 109.1
  Top Layer w8: U1.12 819.72,80.28 840,60 R14.1
  Top Layer w10: R14.1 R9.2
NetR23_2: R23.2 U5.5 U5.6 | length 83.4
  Bottom Layer w10: U5.6 U5.5 ; R23.2 U5.6@605.31,-75.08 ; R23.2@605.79,-123.19 610.63,-128.03 R23.2@610.63,-130
NetR24_2: R24.2 U4.14 U5.2 | length 970.1
  Mid-Layer 2 w8: v1(512.41,-116.2) 548.6,-80 705,-80 728.98,-103.98 838.98,-103.98 860,-125 897.29,-125 1003.64,-18.64 1003.64,53.32 1085.32,135 v1(1110,135)
  Bottom Layer w7: U4.14 1123.58,88.58 1133.03,98.03 1133.03,123.87 1124.15,132.75 1112.25,132.75 v1(1110,135)
  Bottom Layer w10: v1(512.41,-116.2) 514.31,-118.1 533.73,-118.1 R24.2@535,-119.37 ; R24.2 R24.2@535,-119.37 ; U5.2 554.09,-56.22 540.46,-56.22 534.61,-62.08 534.61,-85.46 535,-85.85 R24.2@535,-119.37
NetR25_1: R25.1 R26.2 U4.17 | length 1302.5
  Top Layer w10: v1(540,9.9) 540,8.04 550,-1.96 550,-90 555,-95 595,-95 627.09,-127.09 670.79,-127.09 v1(671.51,-127.82)
  Mid-Layer 1 w8: v1(644.83,-235.98) 644.83,-235.26 660.09,-220 1088.31,-220 1098.31,-210 v1(1100,-210)
  Mid-Layer 2 w8: v1(1100,-210) 1135,-210 1175,-170 1175,-58.12 1149.04,-32.16 1149.04,27.23 1155,33.2 v1(1155,36.98)
  Bottom Layer w10: R26.2 430.32,14.68 459.69,14.68 R25.1 460.63,15 485,15 490.1,9.9 v1(540,9.9) ; v1(644.83,-235.98) 645.95,-234.87 645.95,-173.47 669.22,-150.2 669.22,-130.12 v1(671.51,-127.82) ; U4.17 1134.53,29.53 1140.11,35.11 1153.12,35.11 v1(1155,36.98)
NetR25_2: R25.2 U5.3 | length 133.5
  Bottom Layer w10: R25.2 v1(460,-55) 515,-55 535,-35 554.37,-35 U5.3
NetR27_2: R27.2 U4.19 | length 1016.1
  Mid-Layer 2 w8: v1(400.37,-115.72) 468.98,-184.34 909.53,-184.34 922.26,-171.62 922.26,-162.26 943.6,-140.92 1059.95,-140.92 1091.98,-108.89 1091.98,-32.49 1071.8,-12.31 v1(1068.02,-12.31)
  Bottom Layer w10: R27.2 311.35,-93.02 393.98,-93.02 400.14,-99.18 400.14,-115.5 v1(400.37,-115.72) ; v1(1068.02,-12.31) 1069.97,-10.35 1106.3,-10.35 U4.19
NetR28_1: R28.1 U8.2 | length 179.8
  Bottom Layer w10: U8.2 181,-29 240,30 R28.1
NetR28_2: R28.2 U4.38 | length 568.5
  Mid-Layer 2 w8: v1@371.43,34.77 413.74,34.77 498.52,-50 747.8,-50 763.23,-65.44 v1(764.89,-65.44)
  Bottom Layer w10: R28.2 353.83,30 359.27,35.44 v1(360.86,35.44) ; v1(764.89,-65.44) 764.89,-68.68 777.18,-80.98 777.18,-81.51 784.25,-88.58 U4.38
NetR29_1: R29.1 U6.A2 | length 1200.8
  Top Layer w10: v1(1021.98,-196.42) 1022.38,-196.02 1082.89,-196.02 1090.89,-188.02 1136.98,-188.02 1170.78,-154.22 v1(1170.78,-24.22)
  Mid-Layer 2 w8: v1(289.4,-172.14) 318.24,-200.98 978.69,-200.98 983.65,-196.02 1021.58,-196.02 v1(1021.98,-196.42)
  Bottom Layer w10: v1(1170.78,-24.22) 1170,-23.44 1170,8.37 1196.42,34.79 1196.42,103.78 1190.56,109.64 1180.36,109.64 U6.A2
NetR30_1: R30.1 U6.B2 | length 925.3
  Mid-Layer 2 w8: v1(499.47,-141.01) 518.99,-141.01 540,-120 590,-120 626.37,-156.37 873.63,-156.37 890,-140 921.83,-140 936.9,-124.93 1026.81,-124.93 1033.02,-118.73 1033.02,-17.63 1059.32,8.67 1076.38,8.67 1091.98,24.27 1091.98,43.74 1133.24,85 1149.69,85 v1(1150.81,86.12)
  Bottom Layer w10: R30.1 455.32,-145 475,-145 480,-140 498.46,-140 v1(499.47,-141.01) ; v1(1150.81,86.12) 1151.94,85 1172.23,85 1177.18,89.95 U6.B2 U6.B2
NetU4_16: U4.16 U6.C2 | length 82.2
  Bottom Layer w10: U4.16 1107.32,49.72 1132.12,49.72 1141.36,58.97 1168.9,58.97 U6.C2 U6.C2
P3.0: P1.1 U4.4 | length 936.8
  Mid-Layer 2 w8: P1.1 108.67,256.33 108.67,221.33 120,210 230,210 285.98,154.02 854.55,154.02 909.65,98.92 v1(909.65,97.69)
  Bottom Layer w10: v1(909.65,97.69) 909.65,97.95 920.79,109.09 U4.4
P3.1: P1.2 U4.5 | length 841.4
  Mid-Layer 2 w8: P1.2 295,170 867.28,170 939.58,97.69 v1(939.74,97.69)
  Bottom Layer w10: v1(939.74,97.69) 940.11,98.06 940.11,136.44 U4.5
P3.2: P1.3 U4.6 | length 800.7
  Top Layer w10: P1.3 345.65,300.65 900.2,300.65 v1(950.84,250.02)
  Bottom Layer w10: v1(950.84,250.02) 950.84,247.48 960.16,238.16 U4.6
P3.3: P1.4 U4.7 | length 736
  Mid-Layer 2 w8: v1(858.8,275.31) 858.8,251.2 875.38,234.62 936.56,234.62 977,194.18 998.33,194.18 v1(1000,192.5)
  Bottom Layer w10: P1.4 445.51,300.51 834.49,300.51 v1@860,275 ; U4.7 979.84,172.35 v1(1000,192.5)
P3.4: pad.1@105,160 U4.27 | length 1876.3
  Mid-Layer 1 w8: v1(1152,237.83) 1151.4,237.22 1151.4,213.6 1190,175 1190,137.45 v1(1188.25,135.71)
  Mid-Layer 2 w8: pad.1@105,160 55,210 55,295.96 59.69,300.65 1114.35,300.65 1150,265 1150,239.83 v1(1152,237.83) ; v1(1062.11,-170.53) 1062.58,-170.06 1090.17,-170.06 1126.38,-133.85 1126.38,-86.32 1105.97,-65.91 1105.97,24.11 1140.83,58.97 1168.64,58.97 1173.33,63.65 1173.33,118.11 1188.25,133.03 v1(1188.25,135.71)
  Bottom Layer w10: pad.1@105,160 pad.1@108.67,163.67 ; U4.27 1039.41,-137.32 1039.41,-155.42 1052.22,-168.23 1059.81,-168.23 v1(1062.11,-170.53)
P3.5: pad.1@205,160 U4.28 | length 1692.5
  Mid-Layer 2 w8: pad.1@205,160 95,50 95,-85 45,-135 45,-285 58.17,-298.17 60.51,-300.51 1023.02,-300.51 v1(1045,-278.53)
  Bottom Layer w8: U4.28 1019.21,-163.98 1060,-204.76 1060,-265 1046.47,-278.53 v1(1045,-278.53)
P3.6: P2.6 U4.29 | length 529.1
  Mid-Layer 1 w8: v1(752.57,-128.09) 770.66,-110 845,-110 865,-130 925,-130 954.4,-100.6 v1(955.6,-100.6)
  Bottom Layer w10: P2.6 651.91,-260 666.82,-245.09 666.82,-213.85 v1(752.57,-128.09) ; v1(955.6,-100.6) 956.2,-100 993.67,-100 999.53,-105.86 U4.29
P3.7: R20.2 U4.30 | length 134.9
  Bottom Layer w8: R20.2 969.69,-225.31 995,-200 995,-170 980.35,-155.35 U4.30@980.35,-137.39
  Bottom Layer w10: U4.30 U4.30@980.35,-137.39
RST: R22.1 SBW1.2 U4.23 | length 136
  Bottom Layer w10: U4.23 1107.32,-89.09 1126.84,-89.09 1140.99,-103.24 1144.47,-103.24 1150.23,-108.99 1158.95,-100.27 1204.73,-100.27 SBW1.2 ; R22.1 1150,-108.99 ; SBW1.2@1201.93,-88.07 SBW1.2@1205,-85
RX: U3.1 U4.39 | length 455.1
  Top Layer w10: U3.1 475.59,-20.53 478.46,-23.4 v1(501.6,-23.4)
  Mid-Layer 2 w8: v1(501.6,-23.4) 682.49,-23.4 695.1,-36.02 835.28,-36.02 869.26,-70 v1(870,-70)
  Bottom Layer w10: U4.39 833.35,-69.06 869.06,-69.06 v1(870,-70)
SENSOR_PWR: C20.2 U4.15 U6.A1 | length 355.7
  Mid-Layer 2 w8: v1@1069.56,31.53 1069.56,44.56 v1(1160,135)
  Mid-Layer 2 w10: v1(1067.69,29.66) v1@1069.56,31.53
  Bottom Layer w10: v1(1067.69,29.66) 1069.99,31.95 1069.99,40.44 1070,60 1078.9,68.9 U4.15 ; v1(1160,135) 1160,164.69 1168.5,173.19 1170.47,173.19 C20.2@1175.31,178.03 ; C20.2 C20.2@1175.31,178.03 ; U6.A1 1219.68,135.63 1182.13,173.19 1180.16,173.19 C20.2@1175.31,178.03
SMCLK: R3.2 U4.12 | length 536.4
  Top Layer w10: v1(970,-180) v1@972.03,-182.03
  Mid-Layer 1 w8: v1(970,-180) 1024.92,-125.08 1064.11,-125.08 1091.98,-97.2 1091.98,36.46 1070.55,57.9 v1(1070.55,90.55)
  Bottom Layer w10: R3.2 870,-205.86 875.86,-200 950,-200 v1(970,-180) ; v1(1070.55,90.55) 1072.84,92.84 1072.84,102.84 1079.09,109.09 1079.09,120.81 1078.78,121.13 1078.78,136.3 U4.12
SPI_CS: P1.5 U4.10 | length 622.4
  Mid-Layer 2 w8: P1.5 508.67,256.33 543.67,256.33 612.48,187.52 877.48,187.52 918.34,146.66 942.66,146.66 v1(986.2,103.12)
  Bottom Layer w10: v1@987.24,103.12 1023.3,103.12 1038.39,118.21 1038.39,136.3 U4.10
SPI_MISO: P2.3 U4.25 | length 866.8
  Top Layer w8: P2.3 355,-210 430,-210 442.97,-197.03 832.97,-197.03 900,-130 1029.44,-130 1055,-104.44 v1(1055,-103.09)
  Bottom Layer w10: v1(1055,-103.09) 1068.09,-103.09 1077.76,-112.76 1077.76,-136.3 U4.25
SPI_MOSI: P2.4 U4.24 | length 775.9
  Mid-Layer 1 w8: P2.4 406.84,-258.16 441.84,-258.16 480,-220 575,-220 590,-205 975,-205 1039.94,-140.06 1070.31,-140.06 1079.66,-130.71 1099.84,-130.71 v1(1102.51,-128.03)
  Bottom Layer w10: v1(1102.51,-128.03) 1102.51,-108.78 1103.03,-108.27 U4.24
SPI_SCK: P1.6 U4.11 | length 577.9
  Mid-Layer 2 w8: P1.6 661.5,203.5 926.5,203.5 981.46,148.54 1046.21,148.54 1061.29,163.63 v1(1061.29,182.62) v1@1059,180.32
  Bottom Layer w10: U4.11 1058.58,176.66 1061.29,179.37 v1(1061.29,182.62)
TEST: SBW1.3 U4.22 | length 119.3
  Bottom Layer w7: U4.22@1107.32,-69.41 1108.82,-70.91 1129.14,-70.91 1144.02,-85.78 1169.22,-85.78 SBW1.3
UART_RX: pad.1@205,-170 U4.21 | length 1120.6
  Mid-Layer 2 w8: pad.1@205,-170 250,-215 653.52,-215 658.52,-220 1060,-220 1151.91,-128.09 1151.91,-68.5 1146.1,-62.69 v1(1146.1,-58.9)
  Bottom Layer w8: U4.21 1134.95,-49.21 1144.63,-58.9 v1(1146.1,-58.9)
UART_TX: pad.1@105,-170 U4.20 | length 1187
  Mid-Layer 1 w8: v1(795,-65) 795,-20 825,10 1015,10 v1@1069.84,-44.84
  Mid-Layer 1 w10: pad.1@103.67,-168.67 pad.1@105,-170 ; v1(1069.84,-45) v1@1069.84,-44.84
  Mid-Layer 2 w8: pad.1@105,-170 105,-114.69 109.69,-110 290,-110 315,-85 505,-85 525,-65 715,-65 740,-90 770,-90 v1(795,-65)
  Bottom Layer w10: v1(1069.84,-45) 1070,-45 1085.47,-29.53 U4.20
V_BATOK_RF: P4.3 R5.1 U1.13 | length 717.9
  Top Layer w8: U1.13 809.92,99.68 822.46,99.68 866.91,55.24 v1(866.91,52.06)
  Top Layer w10: R5.1 695,-30 701.5,-23.5 701.5,-17.33 v1(703.8,-15.03)
  Mid-Layer 2 w8: v1(703.8,-15.03) 705,-13.83 705,10 735,40 854.84,40 v1(866.91,52.06) 882.48,67.63 987.86,67.63 1083.28,163.05 1083.28,191.72 1058.99,216.01 1038.99,216.01 P4.3
VBOOST: C1.2 C2.2 C3.2 C16.2 P1.7 R1.2 R23.1 U1.19 U5.4 | length 877.3
  Top Layer w10: v1(574.45,7.97) 574.73,7.7 574.73,-30.04 R1.2 ; P1.7 705,218.98 725,198.98 U1.19
  Bottom Layer w10: C2.2 C3.2 ; C3.2@436.97,115.31 450.27,102.02 480.58,102.02 C16.2 485,65 492.09,57.91 C1.2 ; R23.1 644.68,-128.03 639.84,-123.19 637.87,-123.19 628.02,-113.33 628.02,-41.49 622.16,-35.63 U5.4 585.63,-35.63 574.45,-24.45 v1(574.45,7.97) 574.45,10.55 555,30 C1.2 ; P1.7 701.33,256.33 666.33,256.33 656.01,246.01 603.58,193.58 603.58,143.58 580,120 580,70.63 567.28,57.91 C1.2
Vrect: C4.2 C5.2 Cp1.1 D1.2 D2.2 L1.1 U1.2 | length 395.3
  Top Layer w10: D1.2 284.29,134.61 C4.2 C5.2 330.31,135 D2.2 ; Cp1.1 426.48,94.68 452.03,69.14 L1.1@452.03,67.39 ; L1.1@597.03,67.39 597.28,67.64 597.28,107.28 609.65,119.65 U1.2
VREG: C15.2 P2.7 P3.3 R4.2 R10.2 R11.2 R18.2 R19.2 R22.2 SBW1.4 U4.37 U4.48 | length 3481.2
  Top Layer w10: P3.3 1000,-174.89 1028.9,-145.98 1086.61,-145.98 1100.31,-159.69 1126.03,-159.69 R10.2 ; v1(1017.33,170.53) 1017.33,111.12 1090,38.44 1090,-20 1099.69,-29.69 R11.2 1131.97,-29.69 1136.81,-24.84 1136.81,-20.91 1157.72,0 SBW1.4
  Mid-Layer 1 w10: v1(325,205) 350,230 350,294.65 355.86,300.51 721.78,300.51 755,267.29 v1(755,241.47) ; P3.3@995.47,-255.47 P3.3 ; v1(1205,-213.49) 1206.19,-214.68 1222.96,-214.68 1238.5,-199.14 1238.5,-7.27 1232.64,-1.41 1206.41,-1.41 SBW1.4
  Mid-Layer 2 w8: v1(755,241.47) 776.98,219.49 931.91,219.49 980.88,170.52 v1(1017.33,170.53)
  Bottom Layer w10: R4.2 310.23,-54.46 328.67,-54.46 393.36,10.23 ; v1(325,205) 325,102.39 393.36,34.04 393.36,10.23 ; R19.2 335.16,-184.84 365.47,-184.84 R18.2 370.47,-180.16 370.47,-165.83 391.3,-145 408.82,-145 425,-128.82 425,-20 394.77,10.23 393.36,10.23 ; P2.7@705,-265.51 P2.7@705,-262.76 ; v1(755,241.47) 755,220.86 760.86,215 785,215 795,205 795,185.31 C15.2 810,169.69 810,110.69 811.91,108.78 832.68,108.78 U4.48 ; v1(867.03,-100) 866.75,-100 858.49,-108.27 U4.37 832.68,-107.76 787.24,-107.76 774.55,-120.45 774.55,-140.45 705,-210 P2.7 P2.7@705,-262.76 ; P3.3 1003.16,-263.16 1003.16,-298.67 1005,-300.51 ; R22.2 1150,-195 1168.49,-213.49 1171.92,-213.49 ; v1(1205,-213.49) 1171.92,-213.49 ; P2.7@705,-262.76 742.76,-300.51 1005,-300.51 ; 1005,-300.51 1139.93,-300.51 1145.79,-294.66 1145.79,-239.62 1171.92,-213.49
pads on no net: P3.1 U2.4 U4.3 U4.8 U4.9 U4.13 U4.18 U4.26 U4.33 U4.35 U4.40 U4.42 U4.43

## Polygon pours and split planes (outlines as drawn)
VREG on Mid-Layer 2 "VREG_L-01_P-001" (solid, remove dead copper, pour order 7): 85.82,327.1 85.82,-324.14 85.77,-327.01 cw(c151.43,-486.49) 151.43,-314.03 151.43,-314.16 1246,-314.16 1246,314.14 151.43,314.14 cw(c151.43,486.6)
GND on Bottom Layer "GND_L-01_P-001" (solid, remove dead copper, pour order 8): 85.79,327.07 85.79,-324.17 85.74,-327.04 cw(c151.4,-486.51) 151.4,-314.05 151.4,-314.19 1246,-314.19 1246,314.11 151.4,314.11 cw(c151.4,486.57)
GND on Mid-Layer 1 "GND_L02_P009" (solid, remove dead copper, pour order 9): 85.87,327.12 85.87,-324.13 85.82,-327 cw(c151.48,-486.47) 151.48,-314.01 151.48,-314.15 1246,-314.15 1246,314.15 151.48,314.15 cw(c151.48,486.61)
GND on Top Layer "GND_L-01_P-001" (solid, remove dead copper, pour order 4): 85.87,327.12 85.87,-324.13 85.82,-327 cw(c151.48,-486.47) 151.48,-314.01 151.48,-314.15 1246,-314.15 1246,314.15 151.48,314.15 cw(c151.48,486.61)

## Other copper
Top Layer:
  rectangle net NetC13_1: 295,-45 330,-30
  rectangle net Vrect: 295,85 330,100
  rectangle net NetCs2_2: 174.8,-91.44 193.8,-43.44
  rectangle net NetCs1_2: 175,20 194,68
  rectangle net NetCs1_1: 136,-53 155,35
  region net ANT: 5.37,-55.71 -34,-55.71 -34,-2887.47 5.37,-2887.47
  rectangle net GND: -33.37,54.29 6,2886.05
  region net ANT: 32,-95.5 70,-42.02 70,-10.5 17,-10.5 -25,-41.5 -38,-66.5 -32,-92.5 -18,-104.5 0,-110.5 18,-106.5
  region net GND: 32,95 62,52.77 62,10 17,10 -25,41 -38,66 -32,92 -18,104 0,110 18,106
Bottom Layer:
  rectangle net GND: 15.89,53.03 135,90
  rectangle net ANT: -5,-105 135,-65

## Silkscreen, mask and mechanical layers (free items; w line width, h text height)
Top Overlay:
  text "UW Sensor Systems Laboratory" at 0,1250 h30 r90
  text "WISP 6.0" at 0,-1490 h30 r90
Mechanical 1:
  lines w10: 24.01,2874.27 ccw(c-13.49,2876.77) -50.99,2874.27 -50.99,-2875.73 ccw(c-13.49,-2878.23) 24.01,-2875.73 24.01,-486.47 cw(c196.48,-486.47) 196.48,-314.01 ; 24.01,2874.28 24.01,486.61 ccw(c196.48,486.61) 196.48,314.15 1252,314.15 1252,-314.15 196.48,-314.15